# EAGLE board CT_schematic (EAGLE 7.6.0)

Size 100 x 80 mm. Coordinates in mm from the lower left corner, seen from the top.
Outline: 0,0 100,0 100,80 0,80 0,0
Copper layers (1*16): Top 0.035mm / dielectric 1.5mm / Bottom 0.035mm
Design rules "default": minimum track width 10mil, minimum drill 24mil, track to track 8mil, track to pad 8mil, pad to pad 8mil, via to via 8mil, smd to smd 8mil, copper to edge 40mil, drill to drill 8mil, minimum pad ring 10mil, minimum via ring 8mil, stop-mask expansion 4mil, vias tented up to drill 0mil, thermal gap 10mil

## Footprints (pad centres in the part's own frame; a part is rotated, then mirrored left to right if it is on the bottom)
C0603 = smd 0.8 x 0.8: 1 -0.762,0; 2 0.762,0
C0402 = smd 0.5 x 0.5: 1 -0.508,0; 2 0.508,0
C0805 = smd 1.2 x 1.3: 1 -1.016,0; 2 1.016,0
C1210 = smd 1.2 x 2.5: 1 -1.524,0; 2 1.524,0
R0603 = smd 0.8 x 0.8: 1 -0.762,0; 2 0.762,0
C1206 = smd 1.3 x 1.6: 1 -1.524,0; 2 1.524,0
EXV-9H = smd 3.505 x 1.676: 1 -2.857,0; 2 2.857,0
L0603 = smd 0.8 x 0.8: 1 -0.762,0; 2 0.762,0
IND25X25CZ = smd 2.489 x 3.429: 1 -2.718,0; 2 2.718,0
IND_PM3316 = smd 2.921 x 2.794: 1 -5.144,0; 2 5.144,0
PJ-037B_PACKAGE = drill 3.7 square: 1 12,0 | drill 3.2 square: 2 6,0
LFBGA100 = smd 0.52 x 0.52: A1 -3.6,3.6; A2 -2.8,3.6; A3 -2,3.6; A4 -1.2,3.6; A5 -0.4,3.6; A6 0.4,3.6; A7 1.2,3.6; A8 2,3.6; A9 2.8,3.6; A10 3.6,3.6; B1 -3.6,2.8; B2 -2.8,2.8; B3 -2,2.8; B4 -1.2,2.8; B5 -0.4,2.8; B6 0.4,2.8; B7 1.2,2.8; B8 2,2.8; B9 2.8,2.8; B10 3.6,2.8; C1 -3.6,2; C2 -2.8,2; C3 -2,2; C4 -1.2,2; C5 -0.4,2; C6 0.4,2; C7 1.2,2; C8 2,2; C9 2.8,2; C10 3.6,2; D1 -3.6,1.2; D2 -2.8,1.2; D3 -2,1.2; D4 -1.2,1.2; D5 -0.4,1.2; D6 0.4,1.2; D7 1.2,1.2; D8 2,1.2; D9 2.8,1.2; D10 3.6,1.2; E1 -3.6,0.4; E2 -2.8,0.4; E3 -2,0.4; E4 -1.2,0.4; E5 -0.4,0.4; E6 0.4,0.4; E7 1.2,0.4; E8 2,0.4; E9 2.8,0.4; E10 3.6,0.4; F1 -3.6,-0.4; F2 -2.8,-0.4; F3 -2,-0.4; F4 -1.2,-0.4; F5 -0.4,-0.4; F6 0.4,-0.4; F7 1.2,-0.4; F8 2,-0.4; F9 2.8,-0.4; F10 3.6,-0.4; G1 -3.6,-1.2; G2 -2.8,-1.2; G3 -2,-1.2; G4 -1.2,-1.2; G5 -0.4,-1.2; G6 0.4,-1.2; G7 1.2,-1.2; G8 2,-1.2; G9 2.8,-1.2; G10 3.6,-1.2; H1 -3.6,-2; H2 -2.8,-2; H3 -2,-2; H4 -1.2,-2; H5 -0.4,-2; H6 0.4,-2; H7 1.2,-2; H8 2,-2; H9 2.8,-2; H10 3.6,-2; J1 -3.6,-2.8; J2 -2.8,-2.8; J3 -2,-2.8; J4 -1.2,-2.8; J5 -0.4,-2.8; J6 0.4,-2.8; J7 1.2,-2.8; J8 2,-2.8; J9 2.8,-2.8; J10 3.6,-2.8; K1 -3.6,-3.6; K2 -2.8,-3.6; K3 -2,-3.6; K4 -1.2,-3.6; K5 -0.4,-3.6; K6 0.4,-3.6; K7 1.2,-3.6; K8 2,-3.6; K9 2.8,-3.6; K10 3.6,-3.6
10100565 = smd 0.8 x 2.35: 1 0,0; 2 1.25,0; 3 2.55,0; 4 4.25,0; 5 5.43,0; 6 6.68,0; 7 7.93,0; 8 9.18,0; 9 11.67,0; 10 14.18,0; 11 15.43,0; 12 16.68,0; 13 17.93,0; 14 19.18,0; 15 21.68,0 | smd 1.5 x 3.1: 16 23.495,-1.375; 20 25.685,-22.875 | smd 1.55 x 3.1: 17 -1.815,-1.375; 21 -1.815,-22.875 | drill 1.1 pad 1.1: 18 21.68,-2.375; 19 0.68,-2.375
QFN-32 = smd 0.6 x 0.3: 1 -2.3,1.75; 2 -2.3,1.25; 3 -2.3,0.75; 4 -2.3,0.25; 5 -2.3,-0.25; 6 -2.3,-0.75; 7 -2.3,-1.25; 8 -2.3,-1.75; 17 2.3,-1.75; 18 2.3,-1.25; 19 2.3,-0.75; 20 2.3,-0.25; 21 2.3,0.25; 22 2.3,0.75; 23 2.3,1.25; 24 2.3,1.75 | smd 0.3 x 0.6: 9 -1.75,-2.3; 10 -1.25,-2.3; 11 -0.75,-2.3; 12 -0.25,-2.3; 13 0.25,-2.3; 14 0.75,-2.3; 15 1.25,-2.3; 16 1.75,-2.3; 25 1.75,2.3; 26 1.25,2.3; 27 0.75,2.3; 28 0.25,2.3; 29 -0.25,2.3; 30 -0.75,2.3; 31 -1.25,2.3; 32 -1.75,2.3 | smd 3.2 x 3.2: EXP 0,0
SJ-43515TS-SMT-TR = smd 2.2 x 3: 1 0.6,-7.4; 4 3.4,-7.4 | smd 3 x 3: 2 12.8,-7.4; 5 17,-3 | smd 2 x 3: 3 5.3,0; 6 2.5,0 | drill 1.8: P$7 4.5,-3.69; P$8 11.54,-3.69
WM-64PC = drill 0.6 pad 1: 1 -1,0.95; 2 -1,-0.95
MICRO_USB_AB = smd 0.4 x 1.35: 1 1.3,0.26; 2 0.65,0.26; 3 0,0.26; 4 -0.65,0.26; 5 -1.3,0.26 | drill 0.6 pad 0.95 long: 6 4.175,-2.54; 7 -4.175,-2.54 | drill 0.7 pad 1.1 long: 8 -2.225,0.46; 9 2.225,0.46
SOT143B = smd 1 x 0.7: 1 -0.75,-1 | smd 0.6 x 0.7: 2 0.95,-1; 3 0.95,1; 4 -0.95,1
ABS07-32.768KHZ-7-T = smd 1.1 x 2.4: 1 -2.5,0; 2 0,0
ABLS-25.000MHZ-B2F-T = smd 5.6 x 2.8: 1 -3.81,0; 2 5.69,0
ASFL1 = smd 1.7 x 1.5: 1 -1.27,-1.1; 2 1.27,-1.1; 3 1.27,1.1; 4 -1.27,1.1
IDT74FCT38072 = smd 0.51 x 1: 1 0,0; 2 1.27,0; 3 2.54,0; 4 3.81,0; 5 3.81,4.95; 6 2.54,4.95; 7 1.27,4.95; 8 0,4.95
IR3899MTR1PBF = smd 0.25 x 0.75: 1 0,0; 2 0.5,0; 3 1,0; 4 1.5,0; 5 2,0; 6 2.5,0; 7 3,0 | smd 0.75 x 0.25: 8 3.425,0.78; 9 3.425,1.28; 10 3.425,1.78; 14 -0.425,1.78; 15 -0.425,1.28; 16 -0.425,0.78 | smd 0.3 x 1.95: 11 3.22,3.63 | smd 1.62 x 2.42: 12 1.786,3.8 | smd 1 x 1.95: 13 0.117,3.63 | smd 2.19 x 1.25: 17 1.51,1.26
HTSSOP14 = smd 1.676 x 0.356: 1 -2.8,1.95; 2 -2.8,1.3; 3 -2.8,0.65; 4 -2.8,0; 5 -2.8,-0.65; 6 -2.8,-1.3; 7 -2.8,-1.95; 8 2.8,-1.95; 9 2.8,-1.3; 10 2.8,-0.65; 11 2.8,0; 12 2.8,0.65; 13 2.8,1.3; 14 2.8,1.95 | smd 3 x 5: 15 0,0 | drill 0.4 pad 0.45: P$1 -0.75,1.5; P$2 0.75,1.5; P$3 -0.75,0; P$4 0.8,0; P$5 -0.75,-1.5; P$6 0.9,-1.5
SON-6 = smd 0.55 x 0.3: 1 -0.355,0.5 | smd 0.52 x 0.3: 2 -0.37,0; 3 -0.37,-0.5; 4 0.37,-0.5; 5 0.37,0; 6 0.37,0.5
SW_4-1437565-2 = smd 1.4 x 2.1: 1 -2.23,4.55; 2 -2.23,-4.55; 3 2.23,4.55; 4 2.23,-4.55
LGM67K-G1J2-24-Z = smd 0.8 x 1.4: A -2,0; C 0,0
NC7SZ125M5X = smd 1.3 x 0.7: 1 -1.3,0.95; 2 -1.3,0; 3 -1.3,-0.95; 4 1.3,-0.95; 5 1.3,0.95
DUMMY_PACKAGE_235 = drill 0.3: 1 0,-1; 2 1.5,-1

## Placement (x,y rotation side)
C1  1e-06  [C0603]  -15.24,102.87 0 top  (outside the outline)
C2  1e-07  [C0603]  -19.05,102.87 0 top  (outside the outline)
C3  1e-07  [C0603]  -22.86,102.87 0 top  (outside the outline)
C4  1e-07  [C0603]  -26.67,102.87 0 top  (outside the outline)
C5  1e-07  [C0603]  -30.48,102.87 0 top  (outside the outline)
C6  1e-07  [C0603]  -34.29,102.87 0 top  (outside the outline)
C7  1e-07  [C0603]  -38.1,102.87 0 top  (outside the outline)
C8  4.7e-06  [C0603]  -95.25,97.79 0 top  (outside the outline)
C9  1e-08  [C0603]  -41.91,102.87 0 top  (outside the outline)
C10  1e-06  [C0603]  -45.72,102.87 0 top  (outside the outline)
C11  1e-11  [C0402]  -73.66,107.95 0 top  (outside the outline)
C12  1e-11  [C0402]  -77.47,107.95 0 top  (outside the outline)
C13  1e-11  [C0402]  -81.28,107.95 0 top  (outside the outline)
C14  1e-11  [C0402]  -85.09,107.95 0 top  (outside the outline)
C15  1e-07  [C0402]  -88.9,107.95 0 top  (outside the outline)
C16  1e-05  [C0805]  -34.29,91.44 0 top  (outside the outline)
C17  1e-06  [C0603]  -49.53,102.87 0 top  (outside the outline)
C18  1e-06  [C0603]  -53.34,102.87 0 top  (outside the outline)
C19  1e-06  [C0603]  -57.15,102.87 0 top  (outside the outline)
C20  1e-06  [C0603]  -60.96,102.87 0 top  (outside the outline)
C21  1e-06  [C0603]  -64.77,102.87 0 top  (outside the outline)
C22  1e-06  [C0603]  -68.58,102.87 0 top  (outside the outline)
C23  1e-06  [C0603]  -72.39,102.87 0 top  (outside the outline)
C24  1e-07  [C0402]  -92.71,107.95 0 top  (outside the outline)
C25  1e-07  [C0402]  -96.52,107.95 0 top  (outside the outline)
C26  1e-07  [C0402]  -100.33,107.95 0 top  (outside the outline)
C27  1e-07  [C0402]  -15.24,113.03 0 top  (outside the outline)
C28  1e-06  [C0603]  -76.2,102.87 0 top  (outside the outline)
C29  1e-06  [C0603]  -80.01,102.87 0 top  (outside the outline)
C30  1e-06  [C0603]  -83.82,102.87 0 top  (outside the outline)
C31  1e-06  [C0603]  -87.63,102.87 0 top  (outside the outline)
C32  1e-06  [C0603]  -91.44,102.87 0 top  (outside the outline)
C33  1e-06  [C0603]  -95.25,102.87 0 top  (outside the outline)
C34  1e-06  [C0603]  -99.06,102.87 0 top  (outside the outline)
C35  1e-06  [C0603]  -15.24,107.95 0 top  (outside the outline)
C36  1e-07  [C0402]  -19.05,113.03 0 top  (outside the outline)
C37  1e-07  [C0402]  -22.86,113.03 0 top  (outside the outline)
C38  1e-07  [C0402]  -26.67,113.03 0 top  (outside the outline)
C39  1e-07  [C0402]  -30.48,113.03 0 top  (outside the outline)
C40  1e-06  [C0603]  -19.05,107.95 0 top  (outside the outline)
C41  1e-08  [C0402]  -34.29,113.03 0 top  (outside the outline)
C42  1e-08  [C0402]  -38.1,113.03 0 top  (outside the outline)
C43  0.0001  [C1210]  -86.36,85.09 0 top  (outside the outline)
C44  2.2e-06  [C0603]  -99.06,97.79 0 top  (outside the outline)
C45  1e-07  [C0402]  -41.91,113.03 0 top  (outside the outline)
C46  1e-07  [C0402]  -45.72,113.03 0 top  (outside the outline)
C47  8.2e-09  [C0402]  -66.04,107.95 0 top  (outside the outline)
C48  2.724074888439e-07  [R0603]  -44.45,91.44 0 top  (outside the outline)
C51  1e-06  [C0603]  -22.86,107.95 0 top  (outside the outline)
C52  3.3e-09  [C0402]  -69.85,107.95 0 top  (outside the outline)
C53  1e-07  [C0402]  -49.53,113.03 0 top  (outside the outline)
C54  2.2e-05  [C1210]  -92.71,85.09 0 top  (outside the outline)
C55  2.2e-05  [C1210]  -99.06,85.09 0 top  (outside the outline)
C56  1e-05  [C1206]  -16.51,92.71 0 top  (outside the outline)
C57  1e-05  [C1206]  -22.86,92.71 0 top  (outside the outline)
C58  1e-07  [C0402]  -53.34,113.03 0 top  (outside the outline)
C59  0.0001  [EXV-9H]  -69.85,74.93 0 top  (outside the outline)
C60  0.0001  [EXV-9H]  -81.28,74.93 0 top  (outside the outline)
C61  1e-08  [C0402]  -57.15,113.03 0 top  (outside the outline)
F1  240.0  [L0603]  -26.67,107.95 0 top  (outside the outline)
I1  6.8e-07  [IND25X25CZ]  -38.1,85.09 0 top  (outside the outline)
I2  1e-05  [IND_PM3316]  -73.66,63.5 0 top  (outside the outline)
J1  PJ-037B  [PJ-037B_PACKAGE]  -83.82,50.8 0 top  (outside the outline)
R2  1000.0  [R0603]  -30.48,107.95 0 top  (outside the outline)
R4  4700.0  [R0603]  -34.29,107.95 0 top  (outside the outline)
R5  10000.0  [R0603]  -66.04,97.79 0 top  (outside the outline)
R6  100000.0  [R0603]  -87.63,91.44 0 top  (outside the outline)
R7  100000.0  [R0603]  -92.71,91.44 0 top  (outside the outline)
R8  100000.0  [R0603]  -97.79,91.44 0 top  (outside the outline)
R9  100000.0  [R0603]  -15.24,97.79 0 top  (outside the outline)
R10  100000.0  [R0603]  -20.32,97.79 0 top  (outside the outline)
R11  100000.0  [R0603]  -25.4,97.79 0 top  (outside the outline)
R12  100000.0  [R0603]  -30.48,97.79 0 top  (outside the outline)
R13  100000.0  [R0603]  -35.56,97.79 0 top  (outside the outline)
R14  100000.0  [R0603]  -40.64,97.79 0 top  (outside the outline)
R15  100000.0  [R0603]  -45.72,97.79 0 top  (outside the outline)
R16  100000.0  [R0603]  -50.8,97.79 0 top  (outside the outline)
R17  1270.0  [R0603]  -38.1,107.95 0 top  (outside the outline)
R18  1270.0  [R0603]  -41.91,107.95 0 top  (outside the outline)
R19  1270.0  [R0603]  -45.72,107.95 0 top  (outside the outline)
R20  1270.0  [R0603]  -49.53,107.95 0 top  (outside the outline)
R21  0.1  [R0603]  -53.34,107.95 0 top  (outside the outline)
R22  4030.2416170974  [R0603]  -52.07,91.44 0 top  (outside the outline)
R23  2878.7440122125  [R0603]  -59.69,91.44 0 top  (outside the outline)
R24  63.795609756098  [R0603]  -67.31,91.44 0 top  (outside the outline)
R25  130.0  [R0603]  -57.15,107.95 0 top  (outside the outline)
R26  39000.0  [R0603]  -71.12,97.79 0 top  (outside the outline)
R27  49900.0  [R0603]  -76.2,97.79 0 top  (outside the outline)
R28  5286.7027027027  [R0603]  -74.93,91.44 0 top  (outside the outline)
R29  71007.101651032  [R0603]  -82.55,91.44 0 top  (outside the outline)
R30  22000.0  [R0603]  -81.28,97.79 0 top  (outside the outline)
R31  10000.0  [R0603]  -86.36,97.79 0 top  (outside the outline)
R32  10000.0  [R0603]  -91.44,97.79 0 top  (outside the outline)
R33  9100.0  [R0603]  -60.96,107.95 0 top  (outside the outline)
R34  680000.0  [R0603]  -55.88,97.79 0 top  (outside the outline)
R35  120000.0  [R0603]  -60.96,97.79 0 top  (outside the outline)
U1  stm32f103vch6  [LFBGA100]  -53.34,7.62 0 top  (outside the outline)
U2  10100565  [10100565]  -40.64,25.4 0 top  (outside the outline)
U3  SGTL5000XNAA3  [QFN-32]  -91.44,63.5 0 top  (outside the outline)
U4  SJ-43515TS-SMT-TR  [SJ-43515TS-SMT-TR]  -85.09,10.16 0 top  (outside the outline)
U5  SJ-43515TS-SMT-TR  [SJ-43515TS-SMT-TR]  -39.37,39.37 0 top  (outside the outline)
U6  SJ-43515TS-SMT-TR  [SJ-43515TS-SMT-TR]  -67.31,39.37 0 top  (outside the outline)
U7  WM-64PCT  [WM-64PC]  -53.34,63.5 0 top  (outside the outline)
U8  SGTL5000XNAA3  [QFN-32]  -22.86,76.2 0 top  (outside the outline)
U9  SJ-43515TS-SMT-TR  [SJ-43515TS-SMT-TR]  -95.25,39.37 0 top  (outside the outline)
U10  SJ-43515TS-SMT-TR  [SJ-43515TS-SMT-TR]  -39.37,53.34 0 top  (outside the outline)
U11  SJ-43515TS-SMT-TR  [SJ-43515TS-SMT-TR]  -67.31,53.34 0 top  (outside the outline)
U12  WM-64PCT  [WM-64PC]  -63.5,63.5 0 top  (outside the outline)
U13  47590-0001  [MICRO_USB_AB]  -92.71,52.07 0 top  (outside the outline)
U14  prtr5v0u2ax  [SOT143B]  -69.85,113.03 0 top  (outside the outline)
U15  ABS07-32.768KHZ-7-T  [ABS07-32.768KHZ-7-T]  -57.15,85.09 0 top  (outside the outline)
U16  ABLS-25.000MHZ-B2F-T  [ABLS-25.000MHZ-B2F-T]  -26.67,85.09 0 top  (outside the outline)
U17  ASFL-24.57MHZ-NCS  [ASFL1]  -43.18,74.93 0 top  (outside the outline)
U18  idt74fct38072  [IDT74FCT38072]  -63.5,72.39 0 top  (outside the outline)
U19  IR3899MTR1PBF  [IR3899MTR1PBF]  -44.45,60.96 0 top  (outside the outline)
U20  tps54225PWP  [HTSSOP14]  -66.04,85.09 0 top  (outside the outline)
U21  TPS3895ADRYR  [SON-6]  -77.47,111.76 0 top  (outside the outline)
U22  4-1437565-2  [SW_4-1437565-2]  -27.94,64.77 0 top  (outside the outline)
U23  Q65110A2395  [LGM67K-G1J2-24-Z]  -74.93,85.09 0 top  (outside the outline)
U24  nc7sz125m5x  [NC7SZ125M5X]  -27.94,91.44 0 top  (outside the outline)
U25  Dummy  [DUMMY_PACKAGE_235]  -74.93,113.03 0 top  (outside the outline)

## Library data of the parts
C1-C48 C51-C61 F1 I1 I2 J1 R2 R4-R35 U1-U25 = circuit_tree

## Nets
CLK_CRYSTAL_U1_A1: C11.1 U1.A1 U15.1
CLK_CRYSTAL_U1_B1: C12.1 U1.B1 U15.2
CLK_CRYSTAL_U1_C1: C13.1 U1.C1 U16.1
CLK_CRYSTAL_U1_D1: C14.1 U1.D1 U16.2
CLK_U3_21: U3.21 U18.7
CLK_U8_21: U8.21 U18.6
CLK_U18_3: U17.3 U18.3
GND: C1.2 C2.2 C3.2 C4.2 C5.2 C6.2 C7.2 C8.2 C9.2 C10.2 C11.2 C12.2 C13.2 C14.2 C15.2 C16.2 C24.2 C25.2 C26.2 C27.2 C28.2 C36.2 C37.2 C38.2 C39.2 C40.2 C41.2 C42.2 C44.2 C45.2 C46.2 C51.2 C52.2 C54.2 C55.2 C56.2 C57.2 C58.2 C59.2 C60.2 C61.2 J1.2 R2.2 R5.2 R18.2 R20.2 R21.1 R21.2 R23.2 R26.2 R28.2 R30.2 R33.2 R35.2 U1.C2 U1.E4 U1.E5 U1.E6 U1.E7 U1.G1 U1.H1 U2.6 U2.10 U2.12 U2.16 U2.17 U2.20 U2.21 U3.1 U3.3 U3.7 U3.EXP U5.1 U6.1 U7.2 U8.1 U8.3 U8.7 U8.EXP U10.1 U11.1 U12.2 U13.5 U13.6 U13.7 U13.8 U13.9 U14.1 U17.2 U18.4 U18.5 U18.8 U19.4 U19.11 U19.17 U20.5 U20.8 U20.9 U20.15 U21.2 U23.C U24.1 U24.3 U25.1
NET_U1_D5: R5.1 U1.D5
NET_U1_E1: R4.1 U1.E1 U24.4
NET_U1_K1: C9.1 C10.1 F1.1 U1.J1 U1.K1
NET_U1_K9: U23.A
NET_U1_K10: U22.3 U22.4
NET_U2_1: R8.1 U2.1
NET_U2_2: R7.1 U2.2
NET_U2_18: U2.18 U2.19
NET_U3_10: C27.1 U3.10
NET_U3_29: R17.1 U3.29
NET_U3_31: R18.1 U3.31
NET_U4_1: U3.4 U4.1
NET_U4_2: U3.2 U4.2
NET_U4_5: U3.6 U4.5
NET_U5_2: C18.1 U5.2
NET_U5_5: C17.1 U5.5
NET_U5_11: C18.2
NET_U5_12: C17.2
NET_U6_2: C20.1 C21.1 U6.2
NET_U6_5: C19.1 U6.5
NET_U6_13: C20.2 C21.2
NET_U6_14: C19.2
NET_U7_1: C22.1 C23.1 C28.1 U3.16 U7.1
NET_U7_15: C22.2 C23.2
NET_U8_10: C39.1 U8.10
NET_U8_29: R19.1 U8.29
NET_U8_31: R20.1 U8.31
NET_U9_1: U8.4 U9.1
NET_U9_2: U8.2 U9.2
NET_U9_5: U8.6 U9.5
NET_U10_2: C30.1 U10.2
NET_U10_5: C29.1 U10.5
NET_U10_11: C30.2
NET_U10_12: C29.2
NET_U11_2: C32.1 C33.1 U11.2
NET_U11_5: C31.1 U11.5
NET_U11_13: C32.2 C33.2
NET_U11_14: C31.2
NET_U12_1: C34.1 C35.1 C40.1 U8.16 U12.1
NET_U12_15: C34.2 C35.2
NET_U14_4: U13.1 U14.4
NET_U19_1: C47.1 R22.1 R23.1 R24.1 R25.1 U19.1 U19.8
NET_U19_2: C46.1 U19.2
NET_U19_3: C47.2 C48.1 C48.2 U19.3
NET_U19_5: R26.1 U19.5
NET_U19_10: C44.1 U19.10
NET_U19_12: C43.1 I1.1 U19.12
NET_U19_13: U19.13
NET_U19_14: C43.2 U19.14
NET_U19_15: R27.1 R28.1 U19.15
NET_U19_ATNET_3: I1.2 R22.2
NET_U19_ATNET_4: C48.2 R24.2
NET_U19_ATNET_5: R25.2
NET_U20_2: R29.2 R30.1 U20.2
NET_U20_3: C51.1 U20.3
NET_U20_4: C52.1 U20.4
NET_U20_10: C53.1 I2.1 U20.10 U20.11
NET_U20_12: C53.2 U20.12
NET_U21_1: R32.1 R33.1 U21.1
NET_U21_3: R34.2 R35.1 U21.3
NET_U21_4: R31.1 U21.4 U24.2
NET_U22_1: R2.1 U22.1 U22.2
PROC_DAC_OUT2: U1.H3 U25.2
PROC_I2S2_CK: U1.J8 U3.24
PROC_I2S2_SD: U1.G8 U3.26
PROC_I2S2_WS: U1.K8 U3.23
PROC_I2S3_CK: U1.A7 U8.24
PROC_I2S3_SD: U1.C5 U8.26
PROC_I2S3_WS: U1.A8 U8.23
PROC_SDIO_CK: R6.1 U1.C8 U2.8
PROC_SDIO_D0: R9.1 U1.F9 U2.4
PROC_SDIO_D1: R10.1 U1.E9 U2.3
PROC_SDIO_D2: R11.1 U1.B9 U2.15
PROC_SDIO_D3: R12.1 U1.B8 U2.14
PROC_SDIO_D4: R13.1 U1.B4 U2.13
PROC_SDIO_D5: R14.1 U1.A4 U2.11
PROC_SDIO_D6: R15.1 U1.F10 U2.7
PROC_SDIO_D7: R16.1 U1.E10 U2.5
PROC_USB_DM: U13.2 U14.3
PROC_USB_DP: U13.3 U14.2
VCC_S1_16V4: C45.1 C56.1 C57.1 C59.1 C60.1 J1.1 R27.2 U19.9 U20.7 U20.13 U20.14
VCC_TIER1_1V2: C24.1 C36.1 I1.2 R22.2 U3.30 U8.30
VCC_TIER1_3V3: C1.1 C2.1 C3.1 C4.1 C5.1 C6.1 C7.1 C8.1 C15.1 C16.1 C25.1 C26.1 C37.1 C38.1 C41.1 C42.1 C54.1 C55.1 C58.1 C61.1 F1.2 I2.2 R4.2 R6.2 R7.2 R8.2 R9.2 R10.2 R11.2 R12.2 R13.2 R14.2 R15.2 R16.2 R17.2 R19.2 R29.1 R31.2 R32.2 R34.1 U1.B2 U1.D2 U1.F4 U1.F5 U1.F6 U1.F7 U2.9 U3.5 U3.20 U8.5 U8.20 U17.4 U18.1 U18.2 U20.1 U21.6 U24.5

## Tracks (layer width: path | path; a pad name or v marks a point on that pad's centre or on a via)
CLK_CRYSTAL_U1_A1  (2 unrouted)
CLK_CRYSTAL_U1_B1  (2 unrouted)
CLK_CRYSTAL_U1_C1  (2 unrouted)
CLK_CRYSTAL_U1_D1  (2 unrouted)
CLK_U3_21  (1 unrouted)
CLK_U8_21  (1 unrouted)
CLK_U18_3  (1 unrouted)
GND  (103 unrouted)
NET_U1_D5  (1 unrouted)
NET_U1_E1  (2 unrouted)
NET_U1_K1  (4 unrouted)
NET_U1_K10  (1 unrouted)
NET_U2_1  (1 unrouted)
NET_U2_2  (1 unrouted)
NET_U2_18  (1 unrouted)
NET_U3_10  (1 unrouted)
NET_U3_29  (1 unrouted)
NET_U3_31  (1 unrouted)
NET_U4_1  (1 unrouted)
NET_U4_2  (1 unrouted)
NET_U4_5  (1 unrouted)
NET_U5_2  (1 unrouted)
NET_U5_5  (1 unrouted)
NET_U6_2  (2 unrouted)
NET_U6_5  (1 unrouted)
NET_U6_13  (1 unrouted)
NET_U7_1  (4 unrouted)
NET_U7_15  (1 unrouted)
NET_U8_10  (1 unrouted)
NET_U8_29  (1 unrouted)
NET_U8_31  (1 unrouted)
NET_U9_1  (1 unrouted)
NET_U9_2  (1 unrouted)
NET_U9_5  (1 unrouted)
NET_U10_2  (1 unrouted)
NET_U10_5  (1 unrouted)
NET_U11_2  (2 unrouted)
NET_U11_5  (1 unrouted)
NET_U11_13  (1 unrouted)
NET_U12_1  (4 unrouted)
NET_U12_15  (1 unrouted)
NET_U14_4  (1 unrouted)
NET_U19_1  (6 unrouted)
NET_U19_2  (1 unrouted)
NET_U19_3  (3 unrouted)
NET_U19_5  (1 unrouted)
NET_U19_10  (1 unrouted)
NET_U19_12  (2 unrouted)
NET_U19_14  (1 unrouted)
NET_U19_15  (2 unrouted)
NET_U19_ATNET_3  (1 unrouted)
NET_U19_ATNET_4  (1 unrouted)
NET_U20_2  (2 unrouted)
NET_U20_3  (1 unrouted)
NET_U20_4  (1 unrouted)
NET_U20_10  (3 unrouted)
NET_U20_12  (1 unrouted)
NET_U21_1  (2 unrouted)
NET_U21_3  (2 unrouted)
NET_U21_4  (2 unrouted)
NET_U22_1  (2 unrouted)
PROC_DAC_OUT2  (1 unrouted)
PROC_I2S2_CK  (1 unrouted)
PROC_I2S2_SD  (1 unrouted)
PROC_I2S2_WS  (1 unrouted)
PROC_I2S3_CK  (1 unrouted)
PROC_I2S3_SD  (1 unrouted)
PROC_I2S3_WS  (1 unrouted)
PROC_SDIO_CK  (2 unrouted)
PROC_SDIO_D0  (2 unrouted)
PROC_SDIO_D1  (2 unrouted)
PROC_SDIO_D2  (2 unrouted)
PROC_SDIO_D3  (2 unrouted)
PROC_SDIO_D4  (2 unrouted)
PROC_SDIO_D5  (2 unrouted)
PROC_SDIO_D6  (2 unrouted)
PROC_SDIO_D7  (2 unrouted)
PROC_USB_DM  (1 unrouted)
PROC_USB_DP  (1 unrouted)
VCC_S1_16V4  (10 unrouted)
VCC_TIER1_1V2  (5 unrouted)
VCC_TIER1_3V3  (56 unrouted)